# Altium PCB circuit page19.PcbDoc
Units mm, origin at the board's own origin, x right, y up, seen from the top; angles counter-clockwise.
Board outline 20.04 x 19.99 mm, 2 copper layers (Top Layer, Bottom Layer); 4 components, 4 nets, 8 pads, 0 vias.
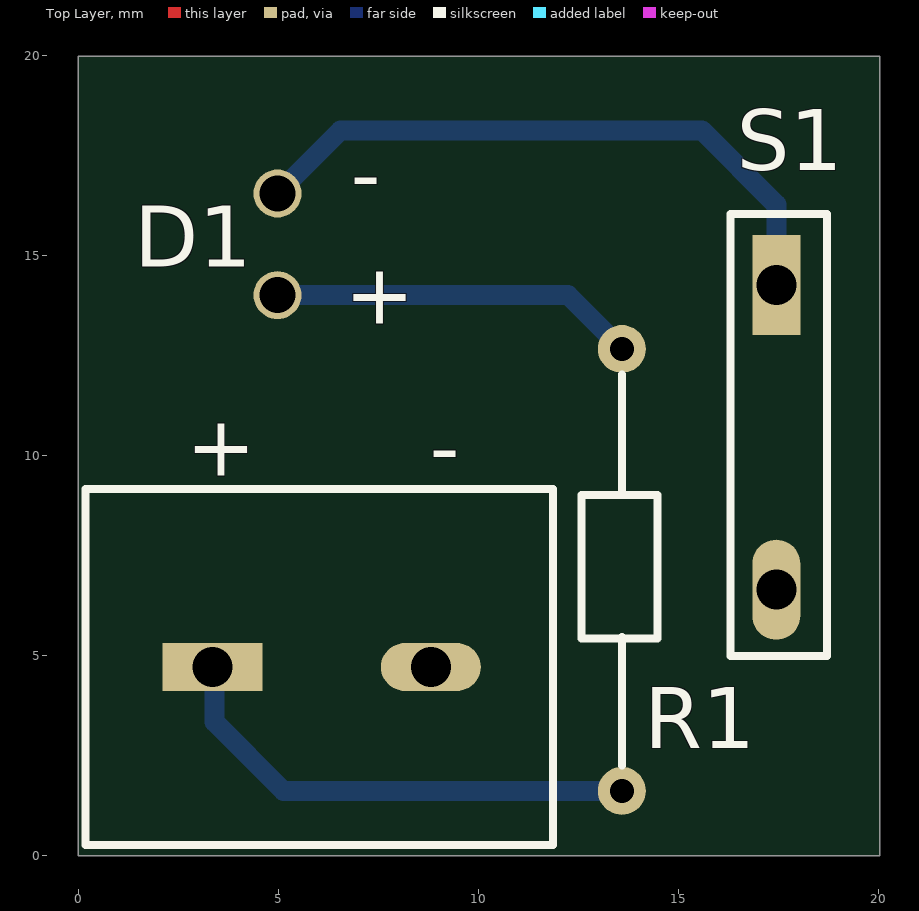
[diagram p0: Top Layer view]
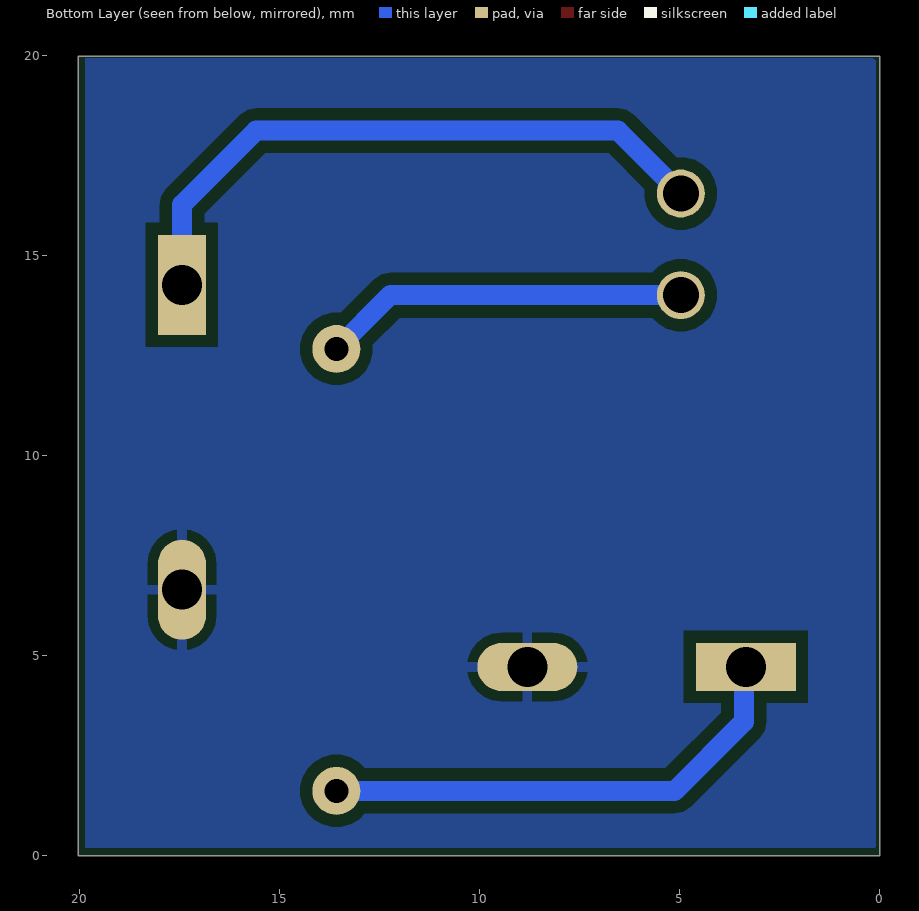
[diagram p1: Bottom Layer view, seen from below]
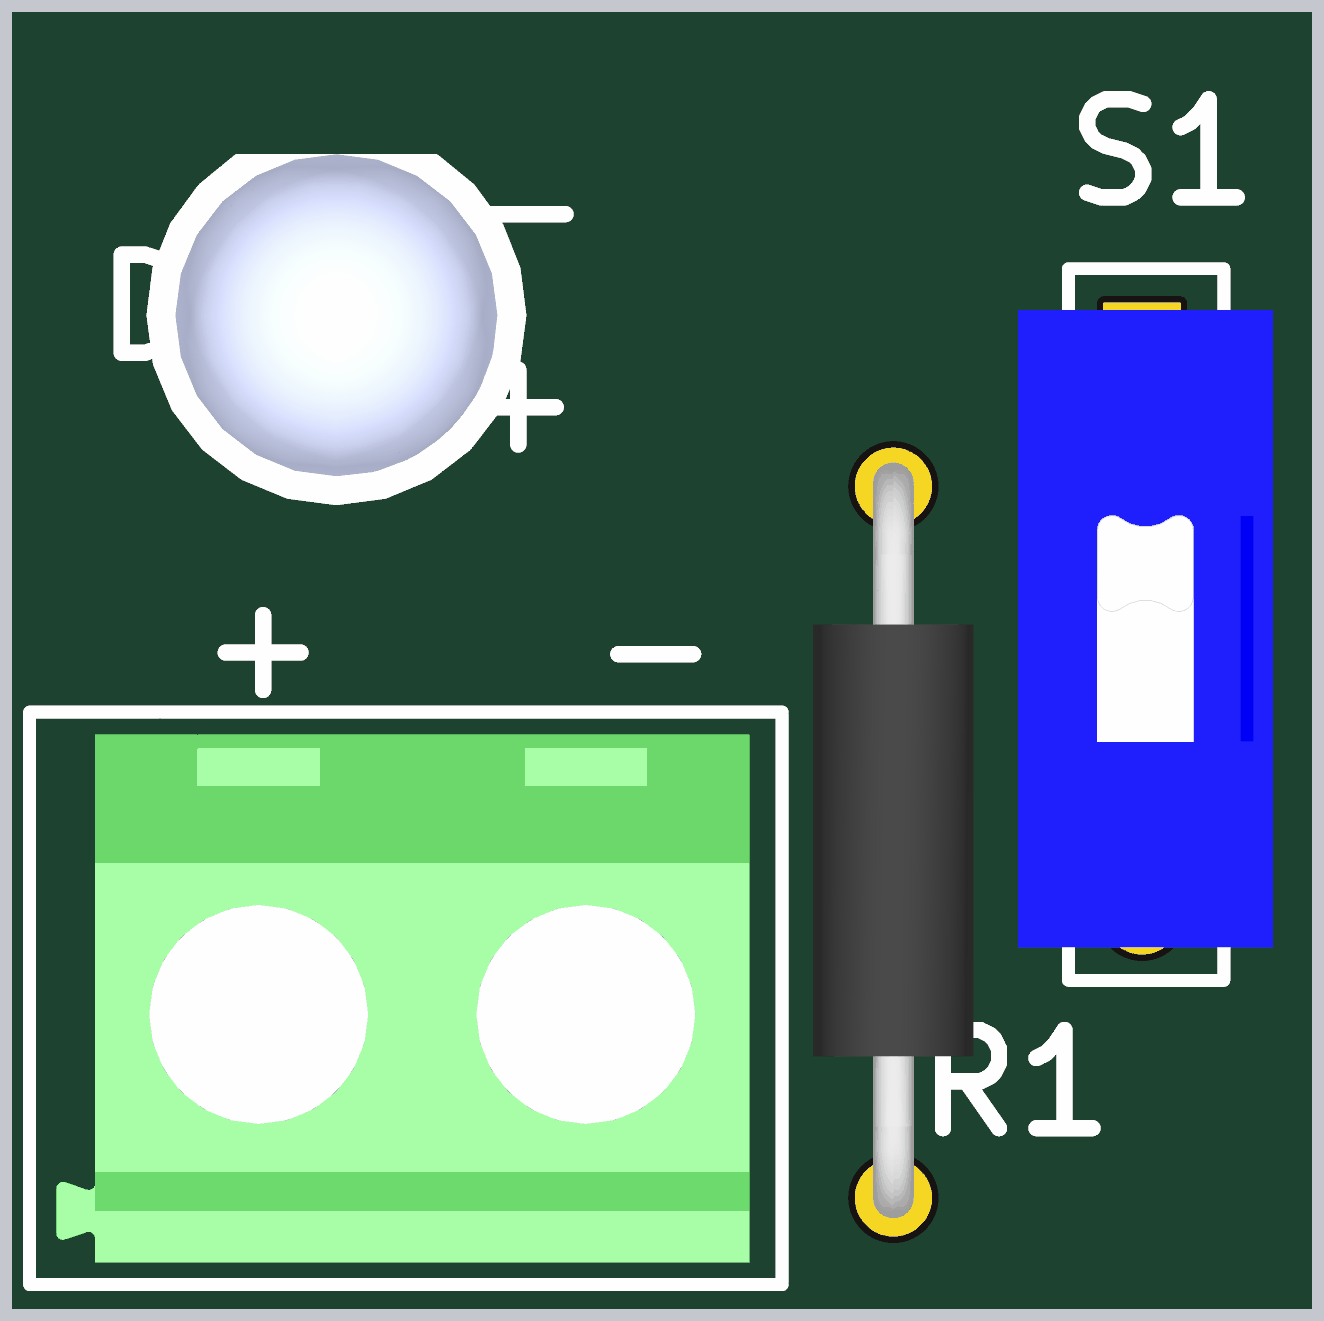
[diagram p2: 3D render of the assembled board from above, using the file's embedded part models]

## Layer stack, top to bottom
Top Solder: solder mask 0.0102, Solder Resist, Dk 3.5
Top Layer: signal copper 0.0356
Dielectric 1: dielectric 0.32, FR-4, Dk 4.8
Bottom Layer: signal copper 0.0356
Bottom Solder: solder mask 0.0102, Solder Resist, Dk 3.5

## Board outline
0,0 20.041,0 20.041,19.99 0,19.99

## Design rules (kind name [scope] priority, off if disabled: settings)
Clearance [All] p1: gap=0.3 ignorepadtopadclearanceinfootprint=FALSE
PolygonConnect [All] p1: connectstyle=Relief reliefconductorwidth=0.254 reliefentries=4 polygonreliefangle="90 Angle" airgapwidth=0.254
RoomDefinition circuit19 [InComponentClass('circuit19')] p1: confinementstyle=ConfineIn formatcopy=TRUE lockcomponents=FALSE outline 178.943,26.924 204.724,26.924 204.724,42.291 178.943,42.291
RoutingVias [All] p1: holewidth=0.3 width=0.6 viastyle="Through Hole" minholewidth=0.3 minwidth=0.6 maxholewidth=0.3 maxwidth=0.6
SolderMaskExpansion [All] p1: expansion=0.102 istentingtop=FALSE
SupplyNets "Schematic Supply Nets_1" [InNet('GND')] p1: voltage=0.000
SupplyNets "Schematic Supply Nets" [InNet('VCC')] p2: voltage=0.000
Width [All] p1: maxlimit=1 minlimit=0.3 preferedwidth=0.5
30 further rules are at their usual default settings.

## Components (designator, comment, footprint, x,y, rotation, side; value= is the part's Value field where it differs from the comment)
D1 "LED 3V" "led TH" 4.978,14.021 r90 top
J1 "terminal block" header -1.6,4.089 r0 top
R1 "330 ohm" 330ohm_TH 13.589,12.802 r270 top
S1 "SWITCH" DIP1 17.45,14.275 r270 top

## Footprints (in the part's own frame and the unit in brackets; to place one, negate y for a bottom-side part, rotate by r counter-clockwise, add the part's x,y. Pads: shape width x height; smd on the part's side, far side on the other; paste and mask are expansions set on the pad)
330ohm_TH [mm]
  round 1.2 hole 0.6: 1(0.127,0) 2(11.176,0)
  silkscreen extent 0.76,-1.02 10.54,0.89, body extent -0.24,-1.24 11.49,1.24, height 2.49
DIP1 [mm]
  rect 2.5x1.2 hole 1: 1(0,0)
  oval 2.5x1.2 hole 1: 2(7.62,0)
  silkscreen extent -1.78,-1.14 9.27,1.27, body extent -1.14,-1.93 8.76,2.03, height 6.56
header [mm]
  rect 2.5x1.2 hole 1: 1(4.953,0.635)
  oval 2.5x1.2 hole 1: 2(10.414,0.635)
  silkscreen extent 1.78,-3.81 13.46,5.08, body extent 2.19,-3.46 12.95,4.73, height 10
"led TH" [mm]
  round 1.2 hole 0.9: 1(0,0) 2(2.54,0)
  body extent -1.62,-2.92 3.81,2.99, height 8.62

## Part data
D1: library part led_TH
J1: library part "terminal block_TH"
R1: library part resistor_TH, "through hole resistor 330 ohm", Manufacturer="TE Connectivity Passive Product", Manufacturer Product Number=LR1F330R, package size="2.30mm x 6.20mm", power rating=0.6W, tolerance=±1%, Packaging="Cut Tape (CT)"
S1: library part "dip swith1_TH", "DIP SWITCH", contact resistance="50 100 mΩ", insulation resistance="100 MΩ", rated current="25 100 Vdc", rated voltage="24 50 Vdc", withstanding voltage="300 Vac", ComponentLink1Description=DATASHEET, ComponentLink1URL=https://www.cuidevices.com/product/resource/ds01-254.pdf

## Nets (pads, with @x,y where several pads share a name; then routed paths per layer and width w, separated by ;. In a path a pad name is that pad's centre, name@x,y a point inside that pad or via, vN(x,y) a via of type N, cw(c..) or ccw(c..) an arc to the next point about the centre after c; other vN are vias at no path point)
GND: J1.2 S1.2 | length 0.5
  Top Layer w0.5: J1.2 J1.2@8.941,4.597 ; S1.2@17.409,6.614 S1.2
  Bottom Layer w0.5: J1.2 J1.2@8.992,4.902
NetD1_1: D1.1 R1.1 | length 9.2
  Bottom Layer w0.5: D1.1 12.243,14.021 R1.1
NetD1_2: D1.2 S1.1 | length 16.5
  Top Layer w0.5: S1.1 S1.1@17.45,14.925
  Bottom Layer w0.5: D1.2 6.553,18.136 15.596,18.136 17.45,16.281 S1.1
VCC: J1.1 R1.2 | length 12.3
  Bottom Layer w0.5: J1.1 3.404,4.674 3.404,3.353 5.131,1.626 R1.2

## Polygon pours and split planes (outlines as drawn)
GND on Bottom Layer "GND_L02_P000" (solid, pour order 0): 0.102,19.888 0.102,0.229 0.127,0.203 19.863,0.203 19.863,19.939 0.178,19.939

## Silkscreen, mask and mechanical layers (free items; w line width, h text height)
Top Overlay:
  text "-" at 6.807,16.307 h1.52
  text "+" at 6.655,13.31 h1.52
  text "+" at 2.692,9.5 h1.52
  text "-" at 8.788,9.474 h1.52
Board Shape:
  lines w0.2: 0,0 0,19.863 0.076,19.939 19.964,19.939 19.99,19.914 19.99,0.051 19.939,0 0,0